# Altium PCB PCB1_8.5_short.PcbDoc
Units mm, origin at the board's own origin, x right, y up, seen from the top; angles counter-clockwise.
Board outline 3.5 x 23.31 mm, 4 copper layers (Top Layer, fs, Layer 2, Bottom Layer), stack 0.603 mm thick; 6 components, 4 nets, 24 pads, 13 vias.
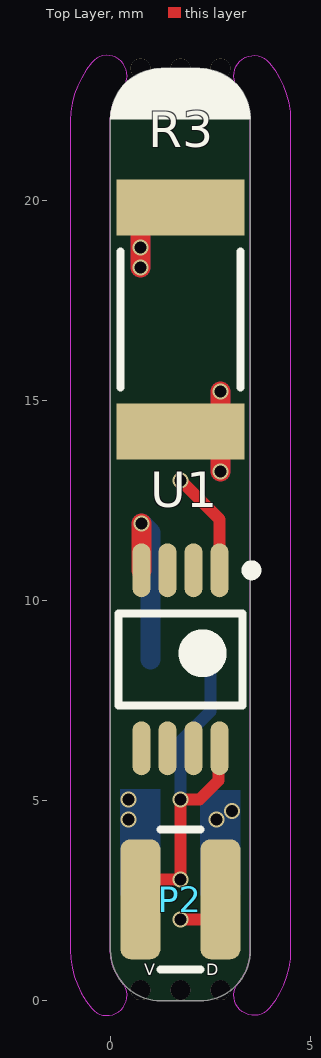
[diagram p0: Top Layer view]
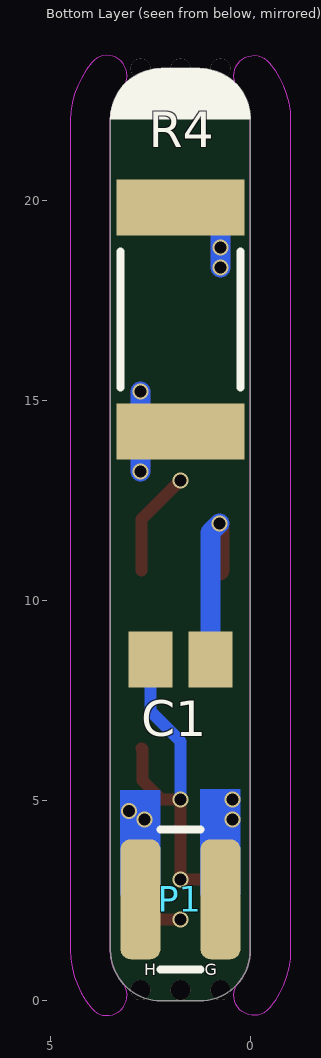
[diagram p1: Bottom Layer view, seen from below]
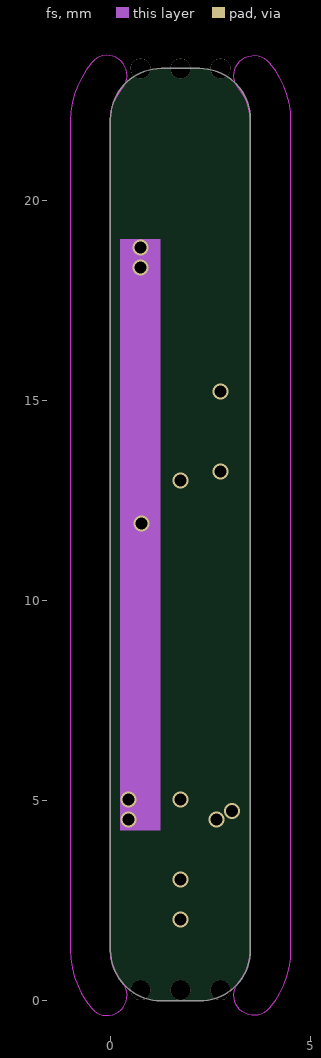
[diagram p2: fs]
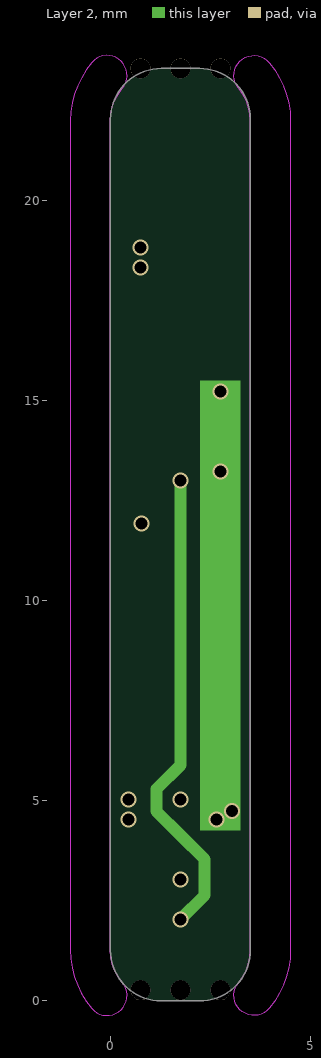
[diagram p3: Layer 2]

## Layer stack, top to bottom
Top Solder: solder mask 0.0102, Solder Resist, Dk 3.5
Top Layer: signal copper 0.0356
Dielectric 2: prepreg 0.0711, PP-006, Dk 4.1
fs: signal copper 0.035
Dielectric 1: dielectric 0.32, FR-4, Dk 4.8
Layer 2: signal copper 0.035
Dielectric 3: prepreg 0.0711, PP-006, Dk 4.1
Bottom Layer: signal copper 0.0356
Bottom Solder: solder mask 0.0102, Solder Resist, Dk 3.5

## Board outline
1.27,0 cw(c1.27,1.27) 0,1.27 0,22.04 cw(c1.27,22.04) 1.27,23.31 2.23,23.31 cw(c2.23,22.04) 3.5,22.04 3.5,1.27 cw(c2.23,1.27) 2.23,0
cut-out: 0,1.268 ccw(c-0.5,1.27) 0,1.27 0,22 ccw(c-0.5,22) 0,22.002 ccw(c1.27,21.997) 0,21.997 0,22.002 cw(c1.27,21.997) 0.297,22.813 ccw(c-0.086,23.135) -0.469,23.457 ccw(c1.27,21.997) -1,21.997 ccw(c-0.5,21.997) -1,21.994 -1,1.276 ccw(c-0.5,1.273) -1,1.273 ccw(c1.27,1.273) -0.469,-0.187 ccw(c-0.086,0.135) 0.297,0.457 cw(c1.27,1.273)
cut-out: 3.5,1.268 cw(c4,1.27) 3.5,1.27 3.5,22 cw(c4,22) 3.5,22.002 cw(c2.23,21.997) 3.5,21.997 3.5,22.002 ccw(c2.23,21.997) 3.203,22.813 cw(c3.586,23.135) 3.969,23.457 cw(c2.23,21.997) 4.5,21.997 cw(c4,21.997) 4.5,21.994 4.5,1.276 cw(c4,1.273) 4.5,1.273 cw(c2.23,1.273) 3.969,-0.187 cw(c3.586,0.135) 3.203,0.457 ccw(c2.23,1.273)

## Design rules (kind name [scope] priority, off if disabled: settings)
Clearance [All] p1: gap=0.254 ignorepadtopadclearanceinfootprint=FALSE except(0: Arc-Hole Track-Hole SMDPad-Hole THPad-Hole Via-Hole Fill-Hole Poly-Hole Region-Hole Text-Hole)
PolygonConnect [All] p1: connectstyle=Relief reliefconductorwidth=0.254 reliefentries=4 polygonreliefangle="90 Angle" airgapwidth=0.254
RoutingVias [All] p1: holewidth=0.711 width=1.27 viastyle="Through Hole" minholewidth=0.711 minwidth=1.27 maxholewidth=0.711 maxwidth=1.27
SolderMaskExpansion [All] p1: expansion=0.102 istentingtop=FALSE
Width [All] p1: maxlimit=0.5 minlimit=0.254 preferedwidth=0.254
30 further rules are at their usual default settings.

## Components (designator, comment, footprint, x,y, rotation, side; value= is the part's Value field where it differs from the comment)
C1 "1u" C0805 1.75,8.54 r0 bottom
P1 "Header 2" HDR1X2-SMT 1.75,2.54 r0 bottom
P2 "Header 2" HDR1X2-SMT 1.75,2.54 r0 top
R3 "50" RES-2512-6332 1.75,17.04 r90 top
R4 "50" RES-2512-6332 1.75,17.04 r90 bottom
U1 "DS18B20U" MSSOP-8 1.75,8.54 r270 top

## Footprints (in the part's own frame and the unit in brackets; to place one, negate y for a bottom-side part, rotate by r counter-clockwise, add the part's x,y. Pads: shape width x height; smd on the part's side, far side on the other; paste and mask are expansions set on the pad)
C0805 [mm] "Chip Capacitor, Body 2.0x1.3mm, IPC High Density"
  rect 1.1x1.4 smd: 1(-0.75,0) 2(0.75,0)
  body extent -1.1,-0.72 1.1,0.72, height 1.4
HDR1X2-SMT [mm] "Connector; Header; 2 Position"
  rrect50% 1x3 smd: 1(-1,0) 2(1,0)
  silkscreen extent -0.5,-1.75 0.5,1.75
MSSOP-8 [mm] "TSOP, 8-Leads, Body 3.00x3.00mm, Pitch 0.65mm, IPC Medium Density"
  oval 1.35x0.45 smd: 1(-2.225,0.975) 2(-2.225,0.325) 3(-2.225,-0.325) 4(-2.225,-0.975) 5(2.225,-0.975) 6(2.225,-0.325) 7(2.225,0.325) 8(2.225,0.975)
  silkscreen extent -2.35,-1.55 1.15,1.9, body extent -2.45,-1.55 2.45,1.55, height 1.1
RES-2512-6332 [mm]
  rect 1.4x3.2 smd: 1(-2.8,0) 2(2.8,0)
  silkscreen extent -1.7,-1.5 1.7,1.5, body extent -3.15,-1.6 3.15,1.6, height 0.6

## Part data
C1: library part Cap, "Capacitor", Link=https://au.mouser.com/ProductDetail/Vishay-Vitramon/VJ1206Y105MXJTW1BC?qs=sGAEpiMZZMs0AnBnWHyRQHefeAIkSpb%2FMIV0RdtEp0g%3D
P1 P2: "Header, 2-Pin", LatestRevisionDate=17-Jul-2002, LatestRevisionNote="Re-released for DXP Platform.", Publisher="Altium Limited"
R3 R4: library part Res3, "Resistor", Link=https://au.mouser.com/ProductDetail/Bourns/CRM2010-FX-51R0ELF?qs=%2FxfeZyN5VBcgDrGLY%2FOOpg%3D%3D
U1: Link=https://au.mouser.com/ProductDetail/Maxim-Integrated/DS18B20U%2bTR?qs=sGAEpiMZZMvbyeSUH4qH%2FCjwslw0Uk0S

## Free pads (board coordinates)
  round 0.5 hole 0.5 unplated: 65(0.75,0.27) 66(1.75,0.27) 67(2.75,0.27) 68(0.75,23.31) 69(1.75,23.31) 70(2.75,23.31)

## Via types
v1: diameter 0.4, hole 0.3, Top Layer to Bottom Layer, tented both sides, 13 vias

## Nets (pads, with @x,y where several pads share a name; then routed paths per layer and width w, separated by ;. In a path a pad name is that pad's centre, name@x,y a point inside that pad or via, vN(x,y) a via of type N, cw(c..) or ccw(c..) an arc to the next point about the centre after c; other vN are vias at no path point)
Data: P2.2 U1.1 | length 15.4
  Top Layer w0.3: v1(1.75,2.04) P2.2@2.55,2.04 ; v1(1.75,13.015) 2.725,12.04 U1.1
  Layer 2 w0.3: v1(1.75,2.04) 2.354,2.644 2.354,3.536 1.75,4.14 1.146,4.744 1.146,5.29 1.75,5.894 1.75,5.936 1.75,12 v1(1.75,13.015)
GND: C1.1 P1.1 R3.2 R4.2 U1.4 | length 7.1
  Top Layer w0.5: v1(0.75,18.34) v1(0.75,18.84) R3.2@0.75,19.39 ; U1.4 v1(0.775,11.94)
  Bottom Layer w0.5: v1(0.75,18.34) v1(0.75,18.84) R4.2@0.75,19.74 ; v1(0.775,11.94) 1,11.715 C1.1
  other v1: 0.45,4.54 0.45,5.04
Heat: P1.2 R3.1 R4.1 | length 2.9
  Top Layer w0.5: v1(2.75,13.24) R3.1@2.75,13.79 ; R3.1@2.75,14.69 v1(2.75,15.24)
  Bottom Layer w0.5: v1(2.75,13.24) R4.1@2.75,14.14 ; R4.1@2.75,14.34 v1(2.75,15.24)
  other v1: 2.65,4.54 3.04,4.744
Vdd: C1.2 P2.1 U1.8 | length 8.9
  Top Layer w0.3: P2.1 P2.1@0.95,2.34 ; P2.1@0.95,3.04 v1(1.75,3.04) v1(1.75,5.04) 2.23,5.04 2.704,5.514 2.704,6.294 U1.8
  Bottom Layer w0.3: v1(1.75,5.04) 1.75,6.49 2.5,7.24 C1.2
pads on no net: U1.2 U1.3 U1.5 U1.6 U1.7

## Other copper
fs:
  region net GND: 1.25,4.27 0.25,4.27 0.25,19.04 1.25,19.04
Layer 2:
  region net Heat: 3.25,4.27 2.25,4.27 2.25,15.5 3.25,15.5
Bottom Layer:
  region net GND: 0.25,2.64 1.25,2.64 1.25,5.29 0.25,5.29
  region net GND: 0.25,2.64 1.25,2.64 1.25,3.74 0.25,3.74
  region net Heat: 2.25,2.64 3.25,2.64 3.25,5.27 2.25,5.27

## Silkscreen, mask and mechanical layers (free items; w line width, h text height)
Top Overlay:
  region: 0,22.04 cw(c1.27,22.04) 1.27,23.31 2.23,23.31 cw(c2.23,22.04) 3.5,22.04
  text "V" at 0.85,0.54 h0.5
  text "D" at 2.4,0.54 h0.5
Bottom Overlay:
  region: 0,22.04 cw(c1.27,22.04) 1.27,23.31 2.23,23.31 cw(c2.23,22.04) 3.5,22.04
  text "G" at 1.146,0.54 h0.5
  text "H" at 2.65,0.54 h0.5
Mechanical 1:
  the board outline again, w0.254
Mechanical 15:
  lines w1: -0.5,1.273 ccw(c1.27,1.273) -0.086,0.135 ; -0.5,21.997 cw(c1.27,21.997) -0.086,23.135 ; -0.5,22 -0.5,1.27 ; 3.586,0.135 ccw(c2.23,1.273) 4,1.273 ; 3.586,23.135 cw(c2.23,21.997) 4,21.997 ; 4,1.27 4,22 ; -0.5,1.27 -0.5,1.27
Drill Drawing:
  the board outline again, w0.254